# EAGLE board connectorvRGB (EAGLE 5.11)
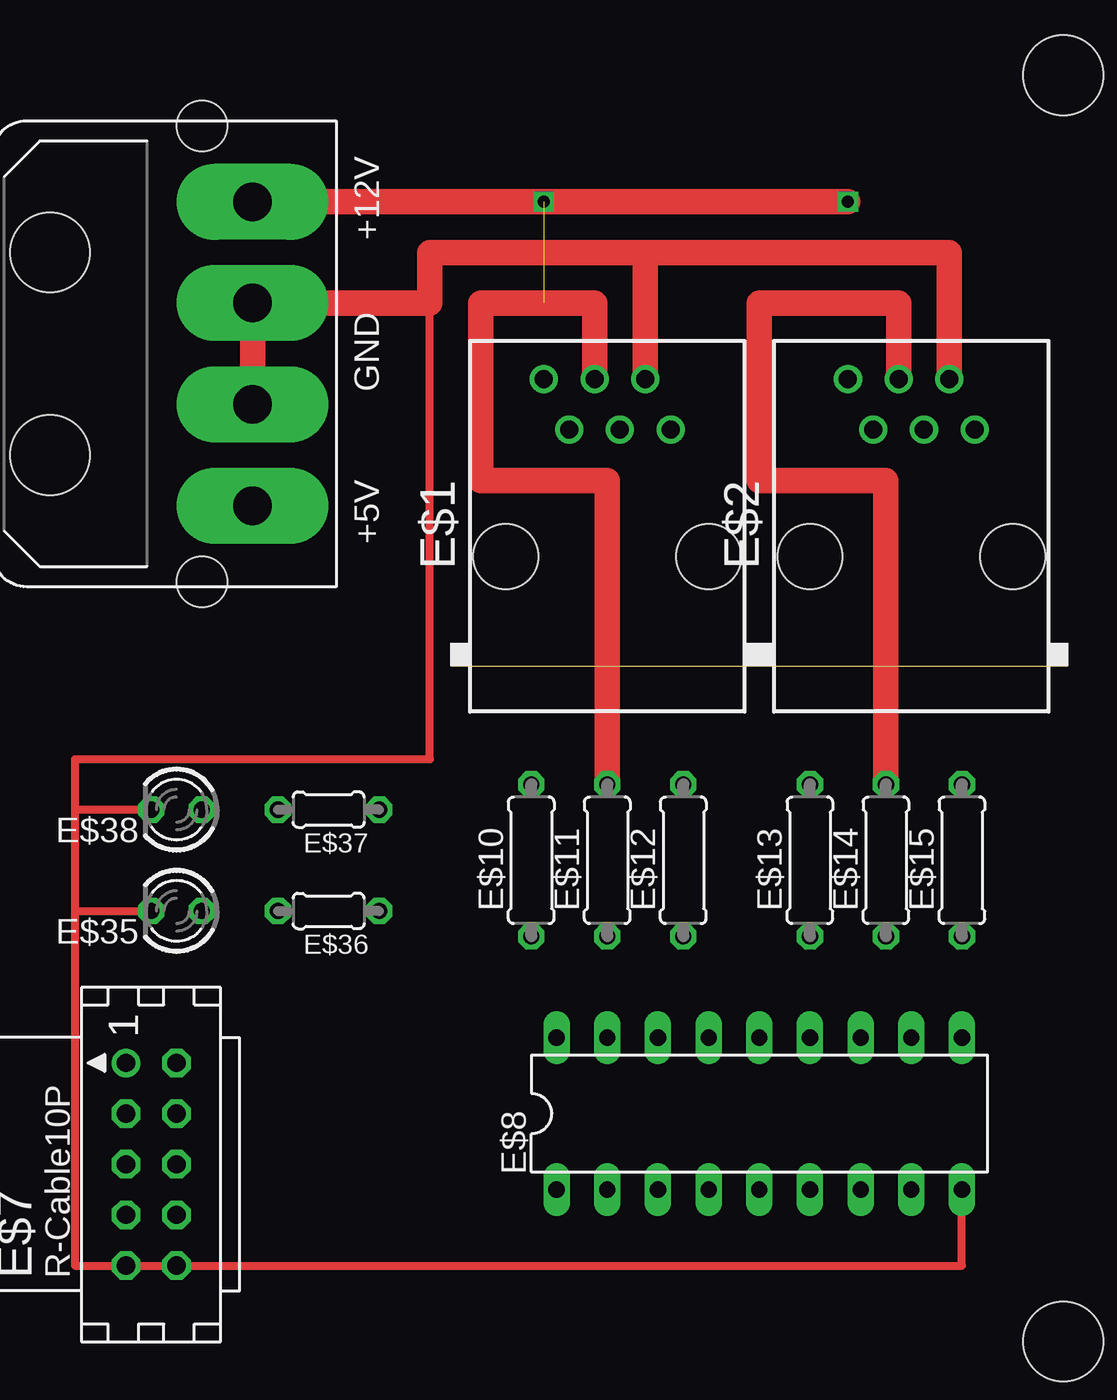
[diagram p0: board, top side]
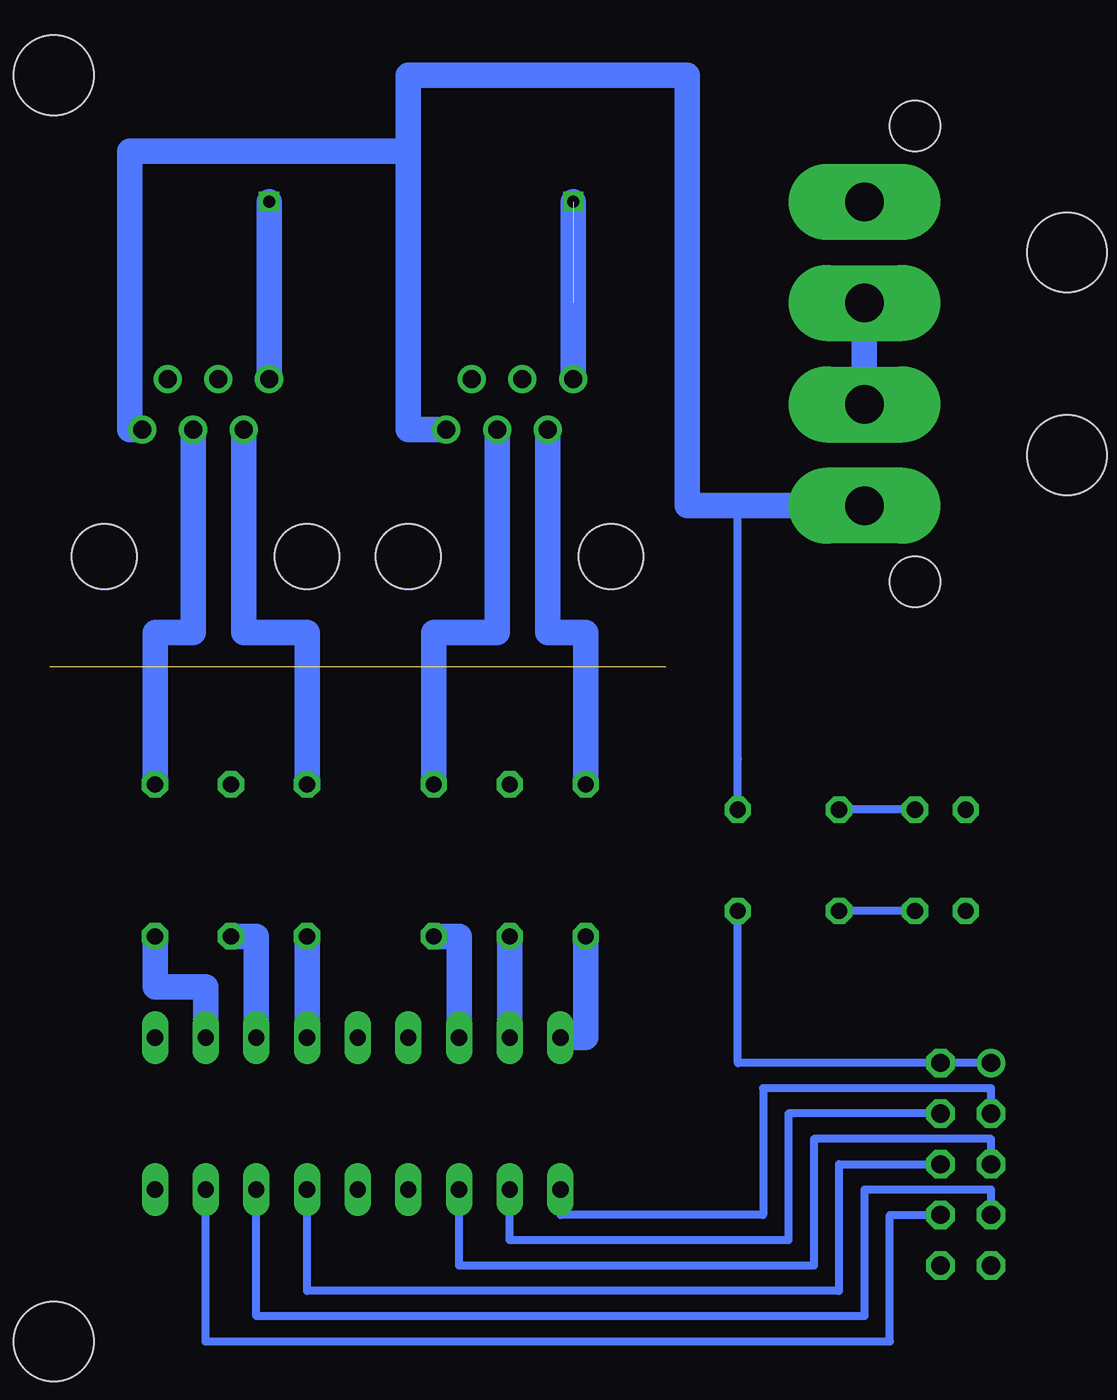
[diagram p1: board, bottom side, seen from below]

Size 30.86 x 0 mm. Coordinates in mm from the lower left corner, seen from the top.
Copper layers (1*16): Top 0.035mm / dielectric 1.5mm / Bottom 0.035mm
Design rules "default": minimum track width 10mil, minimum drill 24mil, track to track 8mil, track to pad 8mil, pad to pad 8mil, via to via 8mil, smd to smd 8mil, copper to edge 40mil, drill to drill 8mil, minimum pad ring 10mil, minimum via ring 8mil, stop-mask expansion 4mil, vias tented up to drill 0mil, thermal gap 10mil
Net classes: 1 Power: width 0.003 mm
Holes 4 mm at 30.67,29.64 30.67,-33.86 -25.21,-33.86 -25.21,29.64
vRestrict: area -29,-37.7 to 34.5,33.5

## Footprints (pad centres in the part's own frame; a part is rotated, then mirrored left to right if it is on the bottom)
RJ11-NO_SHIELD = drill 0.9 pad 1.4 round: 1 -3.175,8.89; 2 -1.905,6.35; 3 -0.635,8.89; 4 0.635,6.35; 5 1.905,8.89; 6 3.175,6.35 | hole 3.251: -5.08,0; 5.08,0
CON10L = drill 0.914 round: 1 5.08,1.27 | drill 0.914 octagon: 2 5.08,-1.27; 3 2.54,1.27; 4 2.54,-1.27; 5 0,1.27; 6 0,-1.27; 7 -2.54,1.27; 8 -2.54,-1.27; 9 -5.08,1.27; 10 -5.08,-1.27
DIL18 = drill 0.813 long: 1 -10.16,-3.81; 2 -7.62,-3.81; 3 -5.08,-3.81; 4 -2.54,-3.81; 5 0,-3.81; 6 2.54,-3.81; 7 5.08,-3.81; 8 7.62,-3.81; 9 10.16,-3.81; 10 10.16,3.81; 11 7.62,3.81; 12 5.08,3.81; 13 2.54,3.81; 14 0,3.81; 15 -2.54,3.81; 16 -5.08,3.81; 17 -7.62,3.81; 18 -10.16,3.81
FLOPPY-4 = drill 1.93 pad 3.81 long: 1 7.62,0; 2 2.54,0; 3 -2.54,0; 4 -7.62,0 | hole 2.54: -11.43,2.54; 11.43,2.54 | hole 3.988: -5.08,10.16; 5.08,10.16
0207/7 = drill 0.813 octagon: 1 -3.81,0; 2 3.81,0
LED3MM = drill 0.813 octagon: A -1.27,0; K 1.27,0
0204/5 = drill 0.813 octagon: 1 -2.54,0; 2 2.54,0

## Placement (x,y rotation side)
E$1  [RJ11-NO_SHIELD]  7.81,5.51 0 top  (outside the outline)
E$2  [RJ11-NO_SHIELD]  23.05,5.51 0 top  (outside the outline)
E$7  [CON10L]  -15.05,-24.97 90 top  (outside the outline)
E$8  ULN2803a  [DIL18]  15.43,-22.43 0 top  (outside the outline)
E$9  [FLOPPY-4]  -9.97,15.67 90 top  (outside the outline)
E$10  Polyswitch 0.4A  [0207/7]  4,-9.73 90 top  (outside the outline)
E$11  Polyswitch 0.4A  [0207/7]  7.81,-9.73 90 top  (outside the outline)
E$12  Polyswitch 0.4A  [0207/7]  11.62,-9.73 90 top  (outside the outline)
E$13  Polyswitch 0.4A  [0207/7]  17.97,-9.73 90 top  (outside the outline)
E$14  Polyswitch 0.4A  [0207/7]  21.78,-9.73 90 top  (outside the outline)
E$15  Polyswitch 0.4A  [0207/7]  25.59,-9.73 90 top  (outside the outline)
E$35  [LED3MM]  -13.78,-12.27 180 top  (outside the outline)
E$36  1k  [0204/5]  -6.16,-12.27 180 top  (outside the outline)
E$37  1k  [0204/5]  -6.16,-7.19 180 top  (outside the outline)
E$38  [LED3MM]  -13.78,-7.19 180 top  (outside the outline)

## Library data of the parts
E$1 E$2 = con-tycoelectronics
E$7 = con-harting
E$8 = 40xx
E$9 = HARDDISK
E$10-E$15 E$36 E$37 = rcl
E$35 E$38 = led

## Nets
S$1: E$7.3 E$8.1
S$2: E$7.4 E$8.2
S$4: E$8.18 E$10.1
S$5: E$1.1 E$2.1
S$6: E$7.5 E$8.3
S$7: E$7.6 E$8.6
S$8: E$7.7 E$8.7
S$9: E$7.8 E$8.8
S$10: E$8.17 E$11.1
S$11: E$8.13 E$13.1
S$12: E$1.4 E$12.2
S$13: E$1.3 E$11.2
S$14: E$1.5 E$2.5 E$7.9 E$7.10 E$8.9 E$9.2 E$9.3 E$35.K E$38.K
S$15: E$8.16 E$12.1
S$16: E$8.12 E$14.1
S$17: E$8.11 E$15.1
S$18: E$1.2 E$10.2
S$19: E$2.2 E$13.2
S$20: E$2.3 E$14.2
S$21: E$2.4 E$15.2
S$22: E$1.6 E$2.6 E$9.4 E$37.1
S$23: E$9.1
S$34: E$7.1 E$7.2 E$36.1
S$35: E$35.A E$36.2
S$36: E$37.2 E$38.A

## Tracks (layer width: path | path; a pad name or v marks a point on that pad's centre or on a via)
S$1
  Bottom 0.406: E$8.1 5.27,-27.51 -4.89,-27.51 -4.89,-21.16 -16.32,-21.16 E$7.3
S$2
  Bottom 0.406: E$7.4 -6.16,-22.43 -6.16,-28.78 7.81,-28.78 E$8.2
S$4
  Bottom 1.27: E$10.1 4,-18.62 E$8.18
S$5  (via drill 0.6)
  Top 1.27: v4.64,23.29 v19.88,23.29
  Bottom 1.27: v19.88,23.29 E$2.1 | E$1.1 v4.64,23.29
S$6
  Bottom 0.406: E$7.5 -16.32,-23.7 -7.43,-23.7 -7.43,-30.05 10.35,-30.05 E$8.3
S$7
  Bottom 0.406: E$7.6 -8.7,-24.97 -8.7,-31.32 17.97,-31.32 E$8.6
S$8
  Bottom 0.406: E$8.7 20.51,-32.59 -9.97,-32.59 -9.97,-26.24 -16.32,-26.24 E$7.7
S$9
  Bottom 0.406: E$8.8 23.05,-33.86 -11.24,-33.86 -11.24,-27.51 E$7.8
S$10
  Bottom 1.27: E$8.17 E$11.1
S$11
  Bottom 1.27: E$8.13 E$13.1
S$12
  Bottom 1.27: E$12.2 11.62,1.7 8.45,1.7 E$1.4
S$13
  Top 1.27: E$1.3 7.18,18.21 1.46,18.21 1.46,9.32 7.81,9.32 E$11.2
S$14
  Top 0.406: -18.86,-12.27 -18.86,-7.19 | -18.86,-12.27 E$35.K | -18.86,-12.27 -18.86,-30.05 E$7.9 E$7.10 25.59,-30.05 E$8.9 | -18.86,-7.19 E$38.K | -18.86,-7.19 -18.86,-4.65 -1.08,-4.65 -1.08,18.21
  Top 1.27: E$2.5 24.96,20.75 9.72,20.75 | E$9.3 E$9.2 -1.08,18.21 -1.08,20.75 9.72,20.75 | 9.72,20.75 E$1.5
  Bottom 1.27: E$9.2 E$9.3
S$15
  Bottom 1.27: E$12.1 10.35,-13.54 E$8.16
S$16
  Bottom 1.27: E$8.12 20.51,-13.54 E$14.1
S$17
  Bottom 1.27: E$8.11 23.05,-16.08 25.59,-16.08 E$15.1
S$18
  Bottom 1.27: E$10.2 4,1.7 5.91,1.7 E$1.2
S$19
  Bottom 1.27: E$13.2 17.97,1.7 21.15,1.7 E$2.2
S$20
  Top 1.27: E$14.2 21.78,9.32 15.43,9.32 15.43,18.21 22.42,18.21 E$2.3
S$21
  Bottom 1.27: E$15.2 25.59,1.7 23.69,1.7 E$2.4
S$22
  Bottom 0.406: -3.62,-4.65 E$37.1 -3.62,8.05 E$9.4
  Bottom 1.27: E$2.6 26.86,11.86 26.86,25.83 12.89,25.83 | 12.89,25.83 12.89,29.64 -1.08,29.64 -1.08,8.05 E$9.4 | 12.89,25.83 12.89,11.86 E$1.6
S$23  (1 unrouted)
  Top 1.27: E$9.1 4.64,23.29
S$34
  Bottom 0.406: E$7.1 E$7.2 -3.62,-19.89 E$36.1
S$35
  Bottom 0.406: E$35.A E$36.2
S$36
  Bottom 0.406: E$38.A E$37.2